# EAGLE board CT_schematic (EAGLE 7.6.0)

Size 100 x 80 mm. Coordinates in mm from the lower left corner, seen from the top.
Outline: 0,0 100,0 100,80 0,80 0,0
Copper layers (1*16): Top 0.035mm / dielectric 1.5mm / Bottom 0.035mm
Design rules "default": minimum track width 10mil, minimum drill 24mil, track to track 8mil, track to pad 8mil, pad to pad 8mil, via to via 8mil, smd to smd 8mil, copper to edge 40mil, drill to drill 8mil, minimum pad ring 10mil, minimum via ring 8mil, stop-mask expansion 4mil, vias tented up to drill 0mil, thermal gap 10mil

## Footprints (pad centres in the part's own frame; a part is rotated, then mirrored left to right if it is on the bottom)
C0603 = smd 0.8 x 0.8: 1 -0.762,0; 2 0.762,0
C0402 = smd 0.5 x 0.5: 1 -0.508,0; 2 0.508,0
C1210 = smd 1.2 x 2.5: 1 -1.524,0; 2 1.524,0
EXV-9H = smd 3.505 x 1.676: 1 -2.857,0; 2 2.857,0
L0603 = smd 0.8 x 0.8: 1 -0.762,0; 2 0.762,0
PJ-037B_PACKAGE = drill 3.7 square: 1 12,0 | drill 3.2 square: 2 6,0
R0603 = smd 0.8 x 0.8: 1 -0.762,0; 2 0.762,0
UFQFPN20 = smd 0.35 x 0.3: 1 0.1,0; 5 0.1,2; 11 -2.7,2; 15 -2.7,0 | smd 0.7 x 0.3: 2 0,0.5; 3 0,1; 4 0,1.5; 12 -2.6,1.5; 13 -2.6,1; 14 -2.6,0.5 | smd 0.3 x 0.35: 6 -0.3,2.4; 10 -2.3,2.4; 16 -2.3,-0.4; 20 -0.3,-0.45 | smd 0.3 x 0.7: 7 -0.8,2.3; 17 -1.8,-0.3; 18 -1.3,-0.3; 19 -0.8,-0.3 | smd 0.3 x 0.8: 8 -1.3,2.3; 9 -1.8,2.3
ETRX3587 = smd 1 x 1.4: 1 0,0; 2 1.27,0; 3 2.54,0; 4 3.81,0; 5 5.08,0; 6 6.35,0; 7 7.62,0; 8 8.89,0; 9 10.16,0; 10 11.43,0; 11 12.7,0; 12 13.97,0; 13 15.24,0; 14 16.51,0; 15 17.78,0; 16 19.05,0; 17 20.32,0; 18 21.59,0; 19 22.86,0; 20 22.86,18.8; 21 21.59,18.8; 22 20.32,18.8; 23 19.05,18.8; 24 17.78,18.8; 25 16.51,18.8; 26 15.24,18.8; 27 13.97,18.8; 28 12.7,18.8; 29 11.43,18.8; 30 10.16,18.8; 31 8.89,18.8; 32 7.62,18.8; 33 6.35,18.8
ASEK = smd 1.4 x 1: 1 -1.1,-0.8; 2 1.1,-0.8; 3 1.1,0.8; 4 -1.1,0.8
ASFL1 = smd 1.7 x 1.5: 1 -1.27,-1.1; 2 1.27,-1.1; 3 1.27,1.1; 4 -1.27,1.1
SOIC-8_EP = smd 1.6 x 0.533: 1 -2.921,1.905; 2 -2.921,0.635; 3 -2.921,-0.635; 4 -2.921,-1.905; 5 2.921,-1.905; 6 2.921,-0.635; 7 2.921,0.635; 8 2.921,1.905 | smd 2.54 x 3.302: EPAD 0,0 | drill 0.406 pad 0.406: P$1 -0.508,0.635; P$2 0.381,0.635; P$3 -0.508,-0.635; P$4 0.381,-0.635
SON-6 = smd 0.55 x 0.3: 1 -0.355,0.5 | smd 0.52 x 0.3: 2 -0.37,0; 3 -0.37,-0.5; 4 0.37,-0.5; 5 0.37,0; 6 0.37,0.5
SW_4-1437565-2 = smd 1.4 x 2.1: 1 -2.23,4.55; 2 -2.23,-4.55; 3 2.23,4.55; 4 2.23,-4.55
LGM67K-G1J2-24-Z = smd 0.8 x 1.4: A -2,0; C 0,0
NC7SZ125M5X = smd 1.3 x 0.7: 1 -1.3,0.95; 2 -1.3,0; 3 -1.3,-0.95; 4 1.3,-0.95; 5 1.3,0.95
DUMMY_PACKAGE_92 = drill 0.3: 1 0,-1; 2 1.5,-1; 3 3,-1

## Placement (x,y rotation side)
C1  1e-07  [C0603]  -62.23,53.34 0 top  (outside the outline)
C2  1e-07  [C0603]  -15.24,58.42 0 top  (outside the outline)
C3  1e-07  [C0603]  -19.05,58.42 0 top  (outside the outline)
C4  1e-07  [C0603]  -22.86,58.42 0 top  (outside the outline)
C5  4.7e-06  [C0603]  -58.42,53.34 0 top  (outside the outline)
C6  1e-08  [C0603]  -26.67,58.42 0 top  (outside the outline)
C7  1e-06  [C0603]  -30.48,58.42 0 top  (outside the outline)
C8  1e-07  [C0402]  -60.96,58.42 0 top  (outside the outline)
C9  1e-08  [C0402]  -64.77,58.42 0 top  (outside the outline)
C10  1e-08  [C0402]  -15.24,63.5 0 top  (outside the outline)
C11  1e-05  [C1210]  -29.21,46.99 0 top  (outside the outline)
C12  1e-05  [C1210]  -35.56,46.99 0 top  (outside the outline)
C13  1e-05  [C1210]  -41.91,46.99 0 top  (outside the outline)
C14  1e-05  [C1210]  -48.26,46.99 0 top  (outside the outline)
C15  1e-07  [C0402]  -19.05,63.5 0 top  (outside the outline)
C16  0.0001  [EXV-9H]  -38.1,39.37 0 top  (outside the outline)
C17  0.0001  [EXV-9H]  -49.53,39.37 0 top  (outside the outline)
C18  1e-08  [C0402]  -22.86,63.5 0 top  (outside the outline)
C19  1e-08  [C0402]  -26.67,63.5 0 top  (outside the outline)
F1  240.0  [L0603]  -34.29,58.42 0 top  (outside the outline)
J1  PJ-037B  [PJ-037B_PACKAGE]  -64.77,7.62 0 top  (outside the outline)
R1  10000.0  [R0603]  -34.29,53.34 0 top  (outside the outline)
R2  1000.0  [R0603]  -38.1,58.42 0 top  (outside the outline)
R3  1600.5  [R0603]  -41.91,58.42 0 top  (outside the outline)
R4  4700.0  [R0603]  -45.72,58.42 0 top  (outside the outline)
R5  4700.0  [R0603]  -49.53,58.42 0 top  (outside the outline)
R6  10000.0  [R0603]  -39.37,53.34 0 top  (outside the outline)
R7  10000.0  [R0603]  -44.45,53.34 0 top  (outside the outline)
R8  4031.5447154472  [R0603]  -19.05,53.34 0 top  (outside the outline)
R9  2200.0  [R0603]  -53.34,58.42 0 top  (outside the outline)
R10  10000.0  [R0603]  -49.53,53.34 0 top  (outside the outline)
R11  10000.0  [R0603]  -54.61,53.34 0 top  (outside the outline)
R12  9100.0  [R0603]  -57.15,58.42 0 top  (outside the outline)
R13  680000.0  [R0603]  -24.13,53.34 0 top  (outside the outline)
R14  120000.0  [R0603]  -29.21,53.34 0 top  (outside the outline)
U1  STM32L011F3U6TR  [UFQFPN20]  -62.23,26.67 0 top  (outside the outline)
U2  ETRX3587  [ETRX3587]  -48.26,1.27 0 top  (outside the outline)
U3  ASEK-32.768KHz-ECST  [ASEK]  -29.21,39.37 0 top  (outside the outline)
U4  ASFL1-12MHZ-NCS  [ASFL1]  -45.72,27.94 0 top  (outside the outline)
U5  MIC5234YME  [SOIC-8_EP]  -59.69,38.1 0 top  (outside the outline)
U6  TPS3895ADRYR  [SON-6]  -35.56,62.23 0 top  (outside the outline)
U7  4-1437565-2  [SW_4-1437565-2]  -27.94,29.21 0 top  (outside the outline)
U8  Q65110A2395  [LGM67K-G1J2-24-Z]  -17.78,46.99 0 top  (outside the outline)
U9  nc7sz125m5x  [NC7SZ125M5X]  -53.34,45.72 0 top  (outside the outline)
U10  nc7sz125m5x  [NC7SZ125M5X]  -59.69,45.72 0 top  (outside the outline)
U11  Dummy  [DUMMY_PACKAGE_92]  -33.02,63.5 0 top  (outside the outline)

## Library data of the parts
C1-C19 F1 J1 R1-R14 U1-U11 = circuit_tree

## Nets
CLK_U1_1: U1.1 U3.3
CLK_U1_5: U1.5 U4.3
GND: C1.2 C2.2 C3.2 C4.2 C5.2 C6.2 C7.2 C8.2 C9.2 C10.2 C11.2 C12.2 C13.2 C14.2 C15.2 C16.2 C17.2 C18.2 C19.2 J1.2 R2.2 R6.2 R7.2 R9.2 R12.2 R14.2 U1.12 U2.1 U2.13 U2.19 U2.20 U2.31 U2.33 U3.2 U4.2 U5.7 U5.EPAD U6.2 U8.C U9.1 U9.3 U10.1 U10.3 U11.1
NET_U1_3: R5.1 U1.3 U10.4
NET_U1_4: C6.1 C7.1 F1.1 U1.4
NET_U1_19: R3.1 U1.19 U8.A
NET_U1_20: R1.1 R6.1 U1.20 U7.3 U7.4
NET_U2_7: R4.1 U2.7 U9.4
NET_U2_21: R7.1 U2.21
NET_U5_4: R8.2 R9.1 U5.4
NET_U6_1: R11.1 R12.1 U6.1
NET_U6_3: R13.2 R14.1 U6.3
NET_U6_4: R10.1 U6.4 U9.2 U10.2
NET_U7_1: R2.1 U7.1 U7.2
PROC_LPUART1_CTS: U1.9 U2.8
PROC_LPUART1_RTS: U1.11 U2.6
PROC_LPUART1_RX: U1.16 U2.17
PROC_LPUART1_TX: U1.6 U2.18
PROC_TIM2_CH3: U1.15 U11.2 U11.3
VCC_S1_15V6: C11.1 C12.1 C16.1 C17.1 J1.1 U5.5 U5.8
VCC_TIER1_3V3: C1.1 C2.1 C3.1 C4.1 C5.1 C8.1 C9.1 C10.1 C13.1 C14.1 C15.1 C18.1 C19.1 F1.2 R1.2 R3.2 R4.2 R5.2 R8.1 R10.2 R11.2 R13.1 U1.13 U2.32 U3.4 U4.4 U5.1 U6.6 U9.5 U10.5

## Tracks (layer width: path | path; a pad name or v marks a point on that pad's centre or on a via)
CLK_U1_1  (1 unrouted)
CLK_U1_5  (1 unrouted)
GND  (43 unrouted)
NET_U1_3  (2 unrouted)
NET_U1_4  (3 unrouted)
NET_U1_19  (2 unrouted)
NET_U1_20  (4 unrouted)
NET_U2_7  (2 unrouted)
NET_U2_21  (1 unrouted)
NET_U5_4  (2 unrouted)
NET_U6_1  (2 unrouted)
NET_U6_3  (2 unrouted)
NET_U6_4  (3 unrouted)
NET_U7_1  (2 unrouted)
PROC_LPUART1_CTS  (1 unrouted)
PROC_LPUART1_RTS  (1 unrouted)
PROC_LPUART1_RX  (1 unrouted)
PROC_LPUART1_TX  (1 unrouted)
PROC_TIM2_CH3  (2 unrouted)
VCC_S1_15V6  (6 unrouted)
VCC_TIER1_3V3  (29 unrouted)